# EAGLE board Horizontal Breakout Module (EAGLE 6.3)
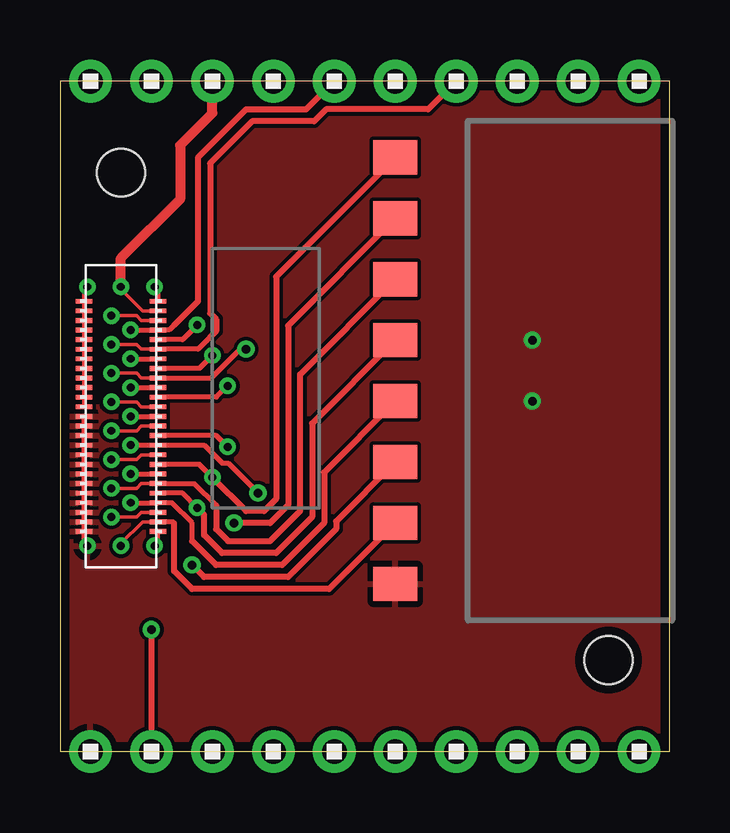
[diagram p0: board, top side]
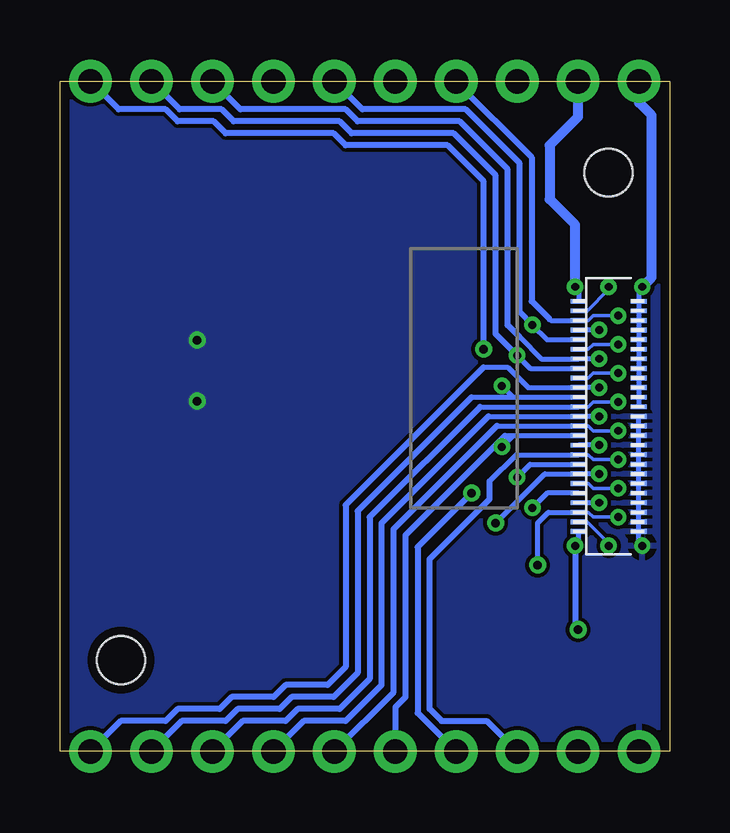
[diagram p1: board, bottom side, seen from below]

Size 25.4 x 27.94 mm. Coordinates in mm from the lower left corner, seen from the top.
Outline: 0,27.94 0,0 25.4,0 25.4,27.94 0,27.94
Copper layers (1*16): Top 0.0356mm / dielectric 1.5011mm / Bottom 0.0356mm
Design rules "default": minimum track width 6mil, minimum drill 13mil, track to track 6mil, track to pad 6mil, pad to pad 6mil, via to via 6mil, smd to smd 6mil, copper to edge 15mil, drill to drill 6mil, minimum pad ring 7mil, minimum via ring 7mil, stop-mask expansion 4mil, vias tented up to drill 16mil, thermal gap 10mil
Holes 2 mm at 2.54,24.13 22.86,3.81

## Footprints (pad centres in the part's own frame; a part is rotated, then mirrored left to right if it is on the bottom)
1X10 = drill 1.016 pad 1.778: 1 0,0; 2 2.54,0; 3 5.08,0; 4 7.62,0; 5 10.16,0; 6 12.7,0; 7 15.24,0; 8 17.78,0; 9 20.32,0; 10 22.86,0
ROOT1.BOTH = smd 0.66 x 0.2 bottom: 01 3.795,13.9; 02 3.795,13.5; 03 3.795,13.1; 3.3V@1 1.285,17.5; 3.3V@2 1.285,17.1; 3.3V@3 1.285,16.7; 3.3V@4 1.285,16.3; 3.3V@5 1.285,15.9; 3.3V@6 1.285,15.5; 3.3V@7 1.285,15.1; 3.3V@8 1.285,14.7; 3.3V@9 1.285,14.3; 3.3V@10 1.285,13.9; 3.3V@11 1.285,13.5; 3.3V@12 1.285,13.1; 04 3.795,12.7; 05 3.795,12.3; 06 3.795,11.9; 07 3.795,11.5; ADC0 3.795,17.5; ADC1 3.795,17.1; GND@1 1.285,7.9; GND@2 1.285,8.3; GND@3 1.285,8.7; GND@4 1.285,9.1; GND@5 1.285,9.5; GND@6 1.285,9.9; GND@7 1.285,10.3; GND@8 1.285,10.7; GND@9 1.285,11.1; GND@10 1.285,11.5; GND@11 1.285,11.9; GND@12 1.285,12.3; GND@13 1.285,12.7; MISO 3.795,15.5; MOSI 3.795,15.9; RST 3.795,7.9; RXI 3.795,14.3; RXI.DBG 3.795,10.3; SCL 3.795,16.3; SCLK 3.795,15.1; SDA 3.795,16.7; TCK 3.795,9.1; TDI 3.795,9.9; TDO 3.795,9.5; TMS 3.795,8.7; TRST 3.795,8.3; TXO 3.795,14.7; TXO.DBG 3.795,10.7; WAKE 3.795,11.1 | smd 0.7 x 0.2: 01@1 4.08,13.9; 02@1 4.08,13.5; 3.3V@13 1,17.5; 3.3V@14 1,17.1; 3.3V@15 1,16.7; 3.3V@16 1,16.3; 3.3V@17 1,15.9; 3.3V@18 1,15.5; 3.3V@19 1,15.1; 3.3V@20 1,14.7; 3.3V@21 1,14.3; 3.3V@22 1,13.9; 3.3V@23 1,13.5; 3.3V@24 1,13.1; 03@1 4.08,13.1; 04@1 4.08,12.7; 05@1 4.08,12.3; 06@1 4.08,11.9; 07@1 4.08,11.5; ADC0@1 4.08,17.5; ADC1@1 4.08,17.1; GND@14 1,7.9; GND@15 1,8.3; GND@16 1,8.7; GND@17 1,9.1; GND@18 1,9.5; GND@19 1,9.9; GND@20 1,10.3; GND@21 1,10.7; GND@22 1,11.1; GND@23 1,11.5; GND@24 1,11.9; GND@25 1,12.3; GND@26 1,12.7; MISO@1 4.08,15.5; MOSI@1 4.08,15.9; RST@1 4.08,7.9; RXI.DBG@1 4.08,10.3; RXI@1 4.08,14.3; SCL@1 4.08,16.3; SCLK@1 4.08,15.1; SDA@1 4.08,16.7; TCK@1 4.08,9.1; TDI@1 4.08,9.9; TDO@1 4.08,9.5; TMS@1 4.08,8.7; TRST@1 4.08,8.3; TXO.DBG@1 4.08,10.7; TXO@1 4.08,14.7; WAKE@1 4.08,11.1 | drill 0.33 pad 0.686: 01@VIA 2.94,13.9; 02@VIA 6.985,13.97; 3.3V@VIA 1.14,18.1; 03@VIA 2.14,13.3; 04@VIA 2.94,12.7; 05@VIA 2.14,12.1; 06@VIA 6.985,11.43; 07@VIA 2.94,11.5; ADC0@VIA 3.94,18.1; ADC1@VIA 2.54,18.1; GND@VIA 1.14,7.3; MISO@VIA 2.14,15.7; MOSI@VIA 5.715,16.51; RST@VIA 3.94,7.3; RXI.DBG@VIA 2.94,10.3; RXI@VIA 2.14,14.5; SCL@VIA 2.94,16.3; SCLK@VIA 2.94,15.1; SDA@VIA 2.14,16.9; TCK@VIA 2.94,9.1; TDI@VIA 2.14,9.7; TDO@VIA 5.715,8.89; TMS@VIA 2.14,8.5; TRST@VIA 2.54,7.3; TXO.DBG@VIA 6.35,10.16; TXO@VIA 6.35,15.24; WAKE@VIA 2.14,10.9
SMH-108-XX-X-S = smd 1.422 x 1.829: 1 -8.89,0; 2 -6.35,0; 3 -3.81,0; 4 -1.27,0; 5 1.27,0; 6 3.81,0; 7 6.35,0; 8 8.89,0

## Placement (x,y rotation side)
U$2  1X10  [1X10]  1.27,0 0 top
U$7  1X10  [1X10]  1.27,27.94 0 top
U$8  ROOT1.BOTH  [ROOT1.BOTH]  0,1.27 0 top
U$10  HEADER.1X8.SMH  [SMH-108-XX-X-S]  13.97,15.88 270 top

## Library data of the parts
U$2 U$7 = .headers(.1in)
U$8 = thinkmaketest
U$10 = samtec

## Nets
01: U$2.10 U$8.01 U$8.01@1 U$8.01@VIA
02: U$2.9 U$8.02 U$8.02@1 U$8.02@VIA
03: U$2.8 U$8.03 U$8.03@1 U$8.03@VIA
3.3V: U$7.1 U$8.3.3V@1 U$8.3.3V@2 U$8.3.3V@3 U$8.3.3V@4 U$8.3.3V@5 U$8.3.3V@6 U$8.3.3V@7 U$8.3.3V@8 U$8.3.3V@9 U$8.3.3V@10 U$8.3.3V@11 U$8.3.3V@12 U$8.3.3V@13 U$8.3.3V@14 U$8.3.3V@15 U$8.3.3V@16 U$8.3.3V@17 U$8.3.3V@18 U$8.3.3V@19 U$8.3.3V@20 U$8.3.3V@21 U$8.3.3V@22 U$8.3.3V@23 U$8.3.3V@24 U$8.3.3V@VIA
04: U$2.7 U$8.04 U$8.04@1 U$8.04@VIA
05: U$2.6 U$8.05 U$8.05@1 U$8.05@VIA
06: U$2.5 U$8.06 U$8.06@1 U$8.06@VIA
07: U$2.4 U$8.07 U$8.07@1 U$8.07@VIA
08: U$2.3 U$8.WAKE U$8.WAKE@1 U$8.WAKE@VIA
ADC0: U$7.2 U$8.ADC0 U$8.ADC0@1 U$8.ADC0@VIA
ADC1: U$7.3 U$8.ADC1 U$8.ADC1@1 U$8.ADC1@VIA
GND: U$2.1 U$8.GND@1 U$8.GND@2 U$8.GND@3 U$8.GND@4 U$8.GND@5 U$8.GND@6 U$8.GND@7 U$8.GND@8 U$8.GND@9 U$8.GND@10 U$8.GND@11 U$8.GND@12 U$8.GND@13 U$8.GND@14 U$8.GND@15 U$8.GND@16 U$8.GND@17 U$8.GND@18 U$8.GND@19 U$8.GND@20 U$8.GND@21 U$8.GND@22 U$8.GND@23 U$8.GND@24 U$8.GND@25 U$8.GND@26 U$8.GND@VIA U$10.8
MISO: U$7.7 U$8.MISO U$8.MISO@1 U$8.MISO@VIA
MOSI: U$7.6 U$8.MOSI U$8.MOSI@1 U$8.MOSI@VIA
RST: U$2.2 U$8.RST U$8.RST@1 U$8.RST@VIA
RXI: U$7.10 U$8.RXI U$8.RXI@1 U$8.RXI@VIA
RXI.DBG: U$8.RXI.DBG U$8.RXI.DBG@1 U$8.RXI.DBG@VIA U$10.2
SCL: U$7.5 U$8.SCL U$8.SCL@1 U$8.SCL@VIA
SCLK: U$7.8 U$8.SCLK U$8.SCLK@1 U$8.SCLK@VIA
SDA: U$7.4 U$8.SDA U$8.SDA@1 U$8.SDA@VIA
TCK: U$8.TCK U$8.TCK@1 U$8.TCK@VIA U$10.5
TDI: U$8.TDI U$8.TDI@1 U$8.TDI@VIA U$10.3
TDO: U$8.TDO U$8.TDO@1 U$8.TDO@VIA U$10.4
TMS: U$8.TMS U$8.TMS@1 U$8.TMS@VIA U$10.6
TRST: U$8.TRST U$8.TRST@1 U$8.TRST@VIA U$10.7
TXO: U$7.9 U$8.TXO U$8.TXO@1 U$8.TXO@VIA
TXO.DBG: U$8.TXO.DBG U$8.TXO.DBG@1 U$8.TXO.DBG@VIA U$10.1

## Tracks (layer width: path | path; a pad name or v marks a point on that pad's centre or on a via)
01
  Bottom 0.203: 7.75,16.02 6.75,16.02 5.9,15.17 U$8.01
  Bottom 0.254: 7.75,16.02 13.5,10.27 13.5,3.52 14.25,2.77 16,2.77 16.5,2.27 18.25,2.27 18.75,1.77 20.5,1.77 21,1.27 22.86,1.27 U$2.10
02
  Bottom 0.203: 8.25,14.77 6.51,14.77
  Bottom 0.254: 8.25,14.77 13,10.02 13,3.27 14,2.27 15.75,2.27 16.25,1.77 18,1.77 18.5,1.27 20.32,1.27 U$2.9
03
  Bottom 0.203: 7.9,14.37 U$8.03
  Bottom 0.254: 7.9,14.37 12.5,9.77 12.5,3.02 13.75,1.77 15.5,1.77 16,1.27 17.78,1.27 U$2.8
3.3V
  Bottom 0.406: U$8.3.3V@VIA 0.75,19.76 0.75,26.52 1.27,27.04 U$7.1
04
  Bottom 0.203: 7.55,13.97 U$8.04
  Bottom 0.254: 7.55,13.97 12,9.52 12,2.77 13.5,1.27 15.24,1.27 U$2.7
05
  Bottom 0.203: 7.2,13.57 U$8.05
  Bottom 0.254: 7.2,13.57 11.5,9.27 11.5,2.47 U$2.6
06
  Bottom 0.203: 6.85,13.17 6.51,13.17
  Bottom 0.254: 6.85,13.17 11,9.02 11,2.27 11.43,1.84 U$2.5
07  (via drill 0.36)
  Top 0.203: U$8.07@1 6,12.77 6.75,12.02 7,12.02 v8.25,10.77
  Bottom 0.254: v8.25,10.77 10.5,8.52 10.5,1.61 U$2.4
08
  Bottom 0.203: 7.5,11.27 6.4,12.37 U$8.WAKE
  Bottom 0.254: 7.5,11.27 7.5,10.52 10,8.02 10,1.77 9.5,1.27 7.62,1.27 U$2.3
ADC0
  Bottom 0.406: U$7.2 3.81,26.46 5,25.27 5,23.02 3.94,21.96 U$8.ADC0@VIA
ADC1
  Top 0.406: U$7.3 6.35,26.62 5,25.27 5,23.02 2.54,20.56 U$8.ADC1@VIA
GND  (via drill 0.36)
  other vias: 19.68,17.14 19.68,14.61
  pour Bottom: 0,0 25.4,0 25.4,27.94 0,27.94
  pour Top: 0,0 25.4,0 25.4,27.94 0,27.94
MISO
  Top 0.203: 6.25,17.27 5.75,16.77 U$8.MISO@1
  Top 0.254: 6.25,17.27 6.5,17.52 6.5,18.02 6.25,18.27 6.25,24.52 8,26.27 10.59,26.27 11.09,26.77 15.34,26.77 U$7.7
MOSI
  Bottom 0.254: U$8.MOSI@VIA 6.25,18.32 6.25,24.52 8.5,26.77 12.8,26.77 U$7.6
RST  (via drill 0.36)
  Top 0.254: v3.81,5.08 U$2.2
  Bottom 0.254: U$8.RST@VIA 3.94,5.21 v3.81,5.08
RXI  (via drill 0.36)
  Top 0.203: U$8.RXI@1 6.3,15.57 7.5,16.77 v7.75,16.77
  Bottom 0.254: v7.75,16.77 7.75,23.77 9.25,25.27 13.5,25.27 14,25.77 18.5,25.77 19,26.27 20.5,26.27 21,26.77 22.96,26.77 U$7.10
RXI.DBG  (via drill 0.36)
  Top 0.254: U$10.2 9.5,17.75 9.5,10.27 8.75,9.52 v7.25,9.52
  Bottom 0.203: v7.25,9.52 5.2,11.57 U$8.RXI.DBG
SCL
  Top 0.203: 4.75,17.77 4.55,17.57 U$8.SCL@1
  Top 0.254: 4.75,17.77 5.75,18.77 5.75,24.77 7.75,26.77 10.26,26.77 U$7.5
SCLK
  Bottom 0.203: 6.25,17.27 5.35,16.37 U$8.SCLK
  Bottom 0.254: U$7.8 17.88,26.77 13.5,26.77 13,26.27 8.75,26.27 6.75,24.27 6.75,17.77 6.25,17.27
SDA
  Bottom 0.203: 5,18.02 4.95,17.97 U$8.SDA
  Bottom 0.254: 5,18.02 5.75,18.77 5.75,24.77 8.89,27.91 U$7.4
TCK
  Top 0.203: 5.5,8.77 5.5,9.52 4.65,10.37 U$8.TCK@1
  Top 0.254: U$10.5 11,11.63 11,9.52 9.25,7.77 6.5,7.77 5.5,8.77
TDI
  Top 0.203: U$8.TDI@1 5.6,11.17 6.5,10.27
  Top 0.254: 6.5,10.27 6.5,9.27 7,8.77 8.75,8.77 10,10.02 10,15.71 U$10.3
TDO
  Top 0.254: U$10.4 10.5,13.68 10.5,9.77 9,8.27 6.75,8.27 6,9.02 6,9.88 U$8.TDO@VIA
TMS  (via drill 0.36)
  Top 0.254: U$10.6 11.5,9.6 11.5,9.27 9.5,7.27 6,7.27 v5.5,7.77
  Bottom 0.203: v5.5,7.77 5.5,9.52 5.05,9.97 U$8.TMS
TRST
  Top 0.203: 4.75,9.52 4.7,9.57 U$8.TRST@1
  Top 0.254: U$10.7 11.21,6.77 5.5,6.77 4.75,7.52 4.75,9.52
TXO
  Bottom 0.254: U$8.TXO@VIA 7.25,17.41 7.25,24.02 9,25.77 13.25,25.77 13.75,26.27 18.17,26.27 18.67,26.77 20.42,26.77 U$7.9
TXO.DBG
  Top 0.254: U$10.1 9,19.8 9,10.52 8.5,10.02 7.76,10.02 U$8.TXO.DBG@VIA

## Text on the board
tDocu: 3.3v | ADC0 | ADC1 | SDA | SCL | MOSI | MISO | SCLK | TXO | RXI | D.TXO | D.TXO | D.RXI | TDI | TDO | TCK | TMS | TRST | GND | GND | RST | 08 | 07 | 06 | 05 | 04 | 03 | 02 | 01
bDocu: 3.3v | ADC0 | ADC1 | SDA | SCL | MOSI | MISO | SCLK | TXO | RXI | D.TXO | D.RXI | TDI | TDO | TCK | TMS | Cruz Monrreal II | innovativemaker.com | TRST | GND | GND | RST | 08 | 07 | 06 | 05 | 04 | 03 | 02 | 01